# Altium PCB ESP32_USBC_V1_I1.PcbDoc (part 2 of 3)
Units mil, origin at the board's own origin, x right, y up, seen from the top; angles counter-clockwise.
Board outline 2700 x 1000 mil, 4 copper layers (L1, L2, L3, L4), stack 61.583 mil thick; 64 components, 73 nets, 299 pads, 161 vias.
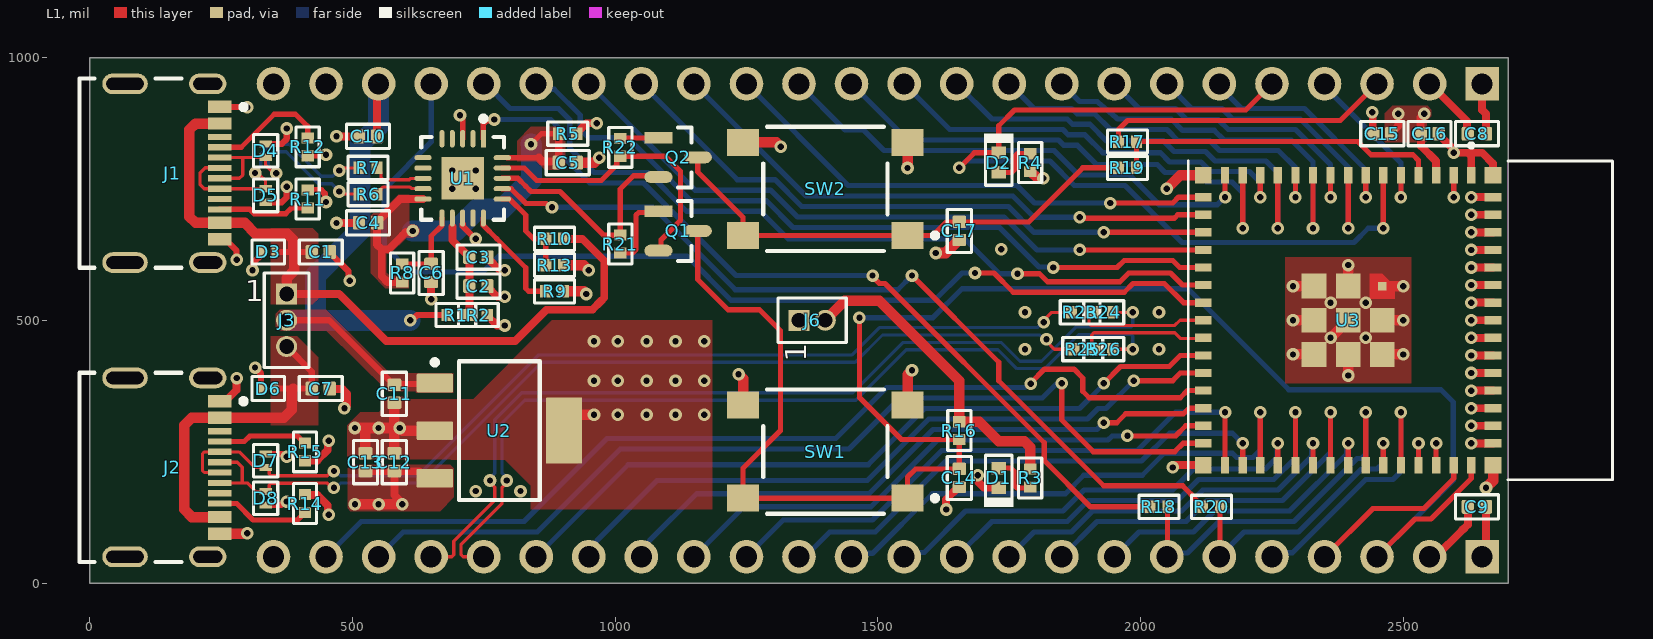
[diagram p0: L1 view]

## Part data (continued)
R3 R4: library part RC0402FR-071KL, "RES 1K OHM 1% 1/16W 0402", Case Code (Imperial)=0402, Manufacturer="Yageo Group", Max Operating Temperature=155°C, Min Operating Temperature=-55°C, Power Dissipation=62.5mW, Power Rating=63mW, Supplier Part Number=311-1.00KLRCT-ND, Temperature Coefficient=100ppm/°C, Voltage Rating (AC)=50V, Case Code (Metric)=0402, Case/Package=0402, Category="Chip SMD Resistors", China RoHS=Non-Compliant, ComponentLink1Description=https://datasheet.octopart.com:443/RC0402FR-071KL-Yageo-datasheet-175887523.pdf?src-supplier=IHS, ComponentLink1URL=https://datasheet.octopart.com:443/RC0402FR-071KL-Yageo-datasheet-175887523.pdf?src-supplier=IHS, ComponentLink2Description=https://datasheet.octopart.com:443/RC0402FR-071KL-Yageo-datasheet-164759695.pdf?src-supplier=Upverter, ComponentLink2URL=https://datasheet.octopart.com:443/RC0402FR-071KL-Yageo-datasheet-164759695.pdf?src-supplier=Upverter, ComponentLink3Description=https://datasheet.octopart.com:443/RC0402FR-071KL-Yageo-datasheet-103092701.pdf?src-supplier=Upverter, ComponentLink3URL=https://datasheet.octopart.com:443/RC0402FR-071KL-Yageo-datasheet-103092701.pdf?src-supplier=Upverter, ComponentLink4Description=https://sigma.octopart.com:443/138820526/technical_drawing/Yageo-RC0402FR-071KL.pdf?src-supplier=Upverter, ComponentLink4URL=https://sigma.octopart.com:443/138820526/technical_drawing/Yageo-RC0402FR-071KL.pdf?src-supplier=Upverter, ComponentLink5Description=https://datasheet.octopart.com:443/RC0402FR-071KL-Yageo-datasheet-98239111.pdf?src-supplier=Upverter, ComponentLink5URL=https://datasheet.octopart.com:443/RC0402FR-071KL-Yageo-datasheet-98239111.pdf?src-supplier=Upverter, ComponentLink6Description=https://datasheet.octopart.com:443/RC0402FR-071KL-Yageo-datasheet-10408619.pdf?src-supplier=Newark, ComponentLink6URL=https://datasheet.octopart.com:443/RC0402FR-071KL-Yageo-datasheet-10408619.pdf?src-supplier=Newark, ComponentLink7Description=https://datasheet.octopart.com:443/RC0402FR-071KL-Yageo-datasheet-8324527.pdf?src-supplier=Newark, ComponentLink7URL=https://datasheet.octopart.com:443/RC0402FR-071KL-Yageo-datasheet-8324527.pdf?src-supplier=Newark, ComponentLink8Description=https://datasheet.octopart.com:443/RC0402FR-071KL-Yageo-datasheet-62067350.pdf?src-supplier=Farnell, ComponentLink8URL=https://datasheet.octopart.com:443/RC0402FR-071KL-Yageo-datasheet-62067350.pdf?src-supplier=Farnell, ComponentLink9Description=https://datasheet.octopart.com:443/RC0402FR-071KL-Yageo-datasheet-12531192.pdf?src-supplier=Future+Electronics, ComponentLink9URL=https://datasheet.octopart.com:443/RC0402FR-071KL-Yageo-datasheet-12531192.pdf?src-supplier=Future+Electronics, ComponentLink10Description=https://datasheet.octopart.com:443/RC0402FR-071KL-Yageo-datasheet-137700087.pdf?src-supplier=Future+Electronics, ComponentLink10URL=https://datasheet.octopart.com:443/RC0402FR-071KL-Yageo-datasheet-137700087.pdf?src-supplier=Future+Electronics, ComponentLink11Description=https://datasheet.octopart.com:443/RC0402FR-071KL-Yageo-datasheet-8324255.pdf?src-supplier=Future+Electronics, ComponentLink11URL=https://datasheet.octopart.com:443/RC0402FR-071KL-Yageo-datasheet-8324255.pdf?src-supplier=Future+Electronics, ComponentLink12Description=https://datasheet.octopart.com:443/RC0402FR-071KL-Yageo-datasheet-8329306.pdf?src-supplier=element14, ComponentLink12URL=https://datasheet.octopart.com:443/RC0402FR-071KL-Yageo-datasheet-8329306.pdf?src-supplier=element14, ComponentLink13Description=https://datasheet.octopart.com:443/RC0402FR-071KL-Yageo-datasheet-505231.pdf?src-supplier=element14, ComponentLink13URL=https://datasheet.octopart.com:443/RC0402FR-071KL-Yageo-datasheet-505231.pdf?src-supplier=element14, ComponentLink14Description=https://datasheet.octopart.com:443/RC0402FR-071KL-Yageo-datasheet-175423674.pdf?src-supplier=SOS+electronic, ComponentLink14URL=https://datasheet.octopart.com:443/RC0402FR-071KL-Yageo-datasheet-175423674.pdf?src-supplier=SOS+electronic, ComponentLink15Description=https://datasheet.octopart.com:443/RC0402FR-071KL-Yageo-datasheet-148775077.pdf?src-supplier=TME, ComponentLink15URL=https://datasheet.octopart.com:443/RC0402FR-071KL-Yageo-datasheet-148775077.pdf?src-supplier=TME, ComponentLink16Description=https://datasheet.octopart.com:443/RC0402FR-071KL-Yageo-datasheet-79472498.pdf?src-supplier=Megastar, ComponentLink16URL=https://datasheet.octopart.com:443/RC0402FR-071KL-Yageo-datasheet-79472498.pdf?src-supplier=Megastar, ComponentLink17Description=https://datasheet.octopart.com/RC0402FR-071KL-Yageo-datasheet-73766026.pdf, ComponentLink17URL=https://datasheet.octopart.com/RC0402FR-071KL-Yageo-datasheet-73766026.pdf, ComponentLink18Description=http://sigma.octopart.com:80/conflict_mineral_statement/Yageo-company-3.pdf?src-supplier=Compliance+Statements, ComponentLink18URL=http://sigma.octopart.com:80/conflict_mineral_statement/Yageo-company-3.pdf?src-supplier=Compliance+Statements, ComponentLink19Description=http://sigma.octopart.com:80/rohs_statement/Yageo-company-2.pdf?src-supplier=Compliance+Statements, ComponentLink19URL=http://sigma.octopart.com:80/rohs_statement/Yageo-company-2.pdf?src-supplier=Compliance+Statements, Composition="Thick Film", Depth=500µm, GRAMS Lib Spec=2.7, Height=350µm, Lead Free="Lead Free", Length=1mm, Lifecycle Status=Production, Manufacturer Part Number=RC0402FR-071KL, Military Standard=Not, Mounting Technology="Surface Mount", Number of Terminals=2, Packaging="Tape & Reel", Parameter 1=C106235, Pins=2, Pricing="1=0.1, 10=0.007, 25=0.0068, 50=0.0062, 100=0.0056, 250=0.00308 (USD)", REACH SVHC=Yes, RoHS=Compliant, Schedule B="8533210045, 8533210045|8533210045|8533210045|8533210045|8533210045|8533210045|8533210045|8533210045|8533210045|8533210045|8533210045|8533210045|8533210045|8533210045|8533210045|8533210045|8533210045|8533210045|8533210045|8533210045|8533210045|8533210045|8533210045|85", Stock=1163425, Supplier=DigiKey, Termination=SMD/SMT, Voltage Rating (DC)=50V, Width=500µm, Working Voltage=50V
R6 R7 R17 R19: library part RC0402FR-0727RL, "RES 27 OHM 1% 1/16W 0402", Case Code (Imperial)=0402, Case Code (Metric)=1005, LCSC Part Number=C138021, Manufacturer="Yageo Group", Max Operating Temperature=155°C, Max Power Dissipation=63mW, Min Operating Temperature=-55°C, Power Dissipation=62.5mW, Supplier Part Number=YAG3086CT-ND, Temperature Coefficient=100ppm/°C, Voltage Rating (AC)=50V, Case/Package=0402, Category="Chip SMD Resistors", China RoHS=Non-Compliant, ComponentLink1Description=https://datasheet.octopart.com:443/RC0402FR-0727RL-Yageo-datasheet-175887523.pdf?src-supplier=Newark, ComponentLink1URL=https://datasheet.octopart.com:443/RC0402FR-0727RL-Yageo-datasheet-175887523.pdf?src-supplier=Newark, ComponentLink2Description=https://datasheet.octopart.com:443/RC0402FR-0727RL-Yageo-datasheet-8324527.pdf?src-supplier=Newark, ComponentLink2URL=https://datasheet.octopart.com:443/RC0402FR-0727RL-Yageo-datasheet-8324527.pdf?src-supplier=Newark, ComponentLink3Description=https://datasheet.octopart.com:443/RC0402FR-0727RL-Yageo-datasheet-103092701.pdf?src-supplier=Upverter, ComponentLink3URL=https://datasheet.octopart.com:443/RC0402FR-0727RL-Yageo-datasheet-103092701.pdf?src-supplier=Upverter, ComponentLink4Description=https://datasheet.octopart.com:443/RC0402FR-0727RL-Yageo-datasheet-10408619.pdf?src-supplier=element14+APAC, ComponentLink4URL=https://datasheet.octopart.com:443/RC0402FR-0727RL-Yageo-datasheet-10408619.pdf?src-supplier=element14+APAC, ComponentLink5Description=https://datasheet.octopart.com:443/RC0402FR-0727RL-Yageo-datasheet-62067350.pdf?src-supplier=element14+APAC, ComponentLink5URL=https://datasheet.octopart.com:443/RC0402FR-0727RL-Yageo-datasheet-62067350.pdf?src-supplier=element14+APAC, ComponentLink6Description=https://datasheet.octopart.com:443/RC0402FR-0727RL-Yageo-datasheet-175423674.pdf?src-supplier=SOS+electronic, ComponentLink6URL=https://datasheet.octopart.com:443/RC0402FR-0727RL-Yageo-datasheet-175423674.pdf?src-supplier=SOS+electronic, ComponentLink7Description=https://datasheet.octopart.com:443/RC0402FR-0727RL-Yageo-datasheet-8329306.pdf?src-supplier=SOS+electronic, ComponentLink7URL=https://datasheet.octopart.com:443/RC0402FR-0727RL-Yageo-datasheet-8329306.pdf?src-supplier=SOS+electronic, ComponentLink8Description=https://datasheet.octopart.com:443/RC0402FR-0727RL-Yageo-datasheet-164759695.pdf?src-supplier=Future+Electronics, ComponentLink8URL=https://datasheet.octopart.com:443/RC0402FR-0727RL-Yageo-datasheet-164759695.pdf?src-supplier=Future+Electronics, ComponentLink9Description=https://datasheet.octopart.com:443/RC0402FR-0727RL-Yageo-datasheet-137700087.pdf?src-supplier=Future+Electronics, ComponentLink9URL=https://datasheet.octopart.com:443/RC0402FR-0727RL-Yageo-datasheet-137700087.pdf?src-supplier=Future+Electronics, ComponentLink10Description=https://datasheet.octopart.com:443/RC0402FR-0727RL-Yageo-datasheet-12531192.pdf?src-supplier=Future+Electronics, ComponentLink10URL=https://datasheet.octopart.com:443/RC0402FR-0727RL-Yageo-datasheet-12531192.pdf?src-supplier=Future+Electronics, ComponentLink11Description=https://datasheet.octopart.com:443/RC0402FR-0727RL-Yageo-datasheet-148775077.pdf?src-supplier=TME, ComponentLink11URL=https://datasheet.octopart.com:443/RC0402FR-0727RL-Yageo-datasheet-148775077.pdf?src-supplier=TME, ComponentLink12Description=https://datasheet.octopart.com/RC0402FR-0727RL-Yageo-datasheet-73766026.pdf, ComponentLink12URL=https://datasheet.octopart.com/RC0402FR-0727RL-Yageo-datasheet-73766026.pdf, ComponentLink13Description=http://sigma.octopart.com:80/conflict_mineral_statement/Yageo-company-3.pdf?src-supplier=Compliance+Statements, ComponentLink13URL=http://sigma.octopart.com:80/conflict_mineral_statement/Yageo-company-3.pdf?src-supplier=Compliance+Statements, ComponentLink14Description=http://sigma.octopart.com:80/rohs_statement/Yageo-company-2.pdf?src-supplier=Compliance+Statements, ComponentLink14URL=http://sigma.octopart.com:80/rohs_statement/Yageo-company-2.pdf?src-supplier=Compliance+Statements, Composition="Thick Film", Depth=500µm, Features="Moisture Resistant", GRAMS Lib Spec=2.7, Height=350µm, Lead Free="Lead Free", Length=1mm, Lifecycle Status=Production, Manufacturer Part Number=RC0402FR-0727RL, Military Standard=Not, Mounting Technology="Surface Mount", Number of Terminals=2, Number of Terminations=2, Pins=2, Power Rating=63mW, Pricing="1=0.1, 10=0.007, 25=0.0068, 50=0.0062, 100=0.0051, 250=0.00308 (USD)", REACH SVHC=Yes, RoHS=Compliant, Schedule B="8533210045, 8533210045|8533210045, 8533210045|8533210045|8533210045, 8533210045|8533210045|8533210045|8533210045", Stock=387948, Supplier=DigiKey, Termination=SMD/SMT, Voltage Rating (DC)=50V, Weight=652.039032µg, Width=500µm, Working Voltage=50V
R9 R13 R16 R21 R22: library part AC0402FR-0710KL, "RES SMD 10K OHM 1% 1/16W 0402", Case Code (Imperial)=0402, Case Code (Metric)=1005, LCSC Part Number=C144807, Manufacturer="Yageo Group", Max Operating Temperature=155°C, Max Power Dissipation=63mW, Min Operating Temperature=-55°C, Power Dissipation=62.5mW, Supplier Part Number=YAG3436CT-ND, Temperature Coefficient=100ppm/°C, Working Voltage=50V, Case/Package=0402, Category="Chip SMD Resistors", China RoHS=Non-Compliant, ComponentLink1Description=https://datasheet.octopart.com:443/AC0402FR-0710KL-Yageo-datasheet-182189377.pdf?src-supplier=IHS, ComponentLink1URL=https://datasheet.octopart.com:443/AC0402FR-0710KL-Yageo-datasheet-182189377.pdf?src-supplier=IHS, ComponentLink2Description=https://datasheet.octopart.com:443/AC0402FR-0710KL-Yageo-datasheet-83209224.pdf?src-supplier=Upverter, ComponentLink2URL=https://datasheet.octopart.com:443/AC0402FR-0710KL-Yageo-datasheet-83209224.pdf?src-supplier=Upverter, ComponentLink3Description=https://datasheet.octopart.com:443/AC0402FR-0710KL-Yageo-datasheet-178509465.pdf?src-supplier=Newark, ComponentLink3URL=https://datasheet.octopart.com:443/AC0402FR-0710KL-Yageo-datasheet-178509465.pdf?src-supplier=Newark, ComponentLink4Description=https://datasheet.octopart.com:443/AC0402FR-0710KL-Yageo-datasheet-166720450.pdf?src-supplier=JRH+Electronics, ComponentLink4URL=https://datasheet.octopart.com:443/AC0402FR-0710KL-Yageo-datasheet-166720450.pdf?src-supplier=JRH+Electronics, ComponentLink5Description=https://datasheet.octopart.com:443/AC0402FR-0710KL-Yageo-datasheet-151884373.pdf?src-supplier=Future+Electronics, ComponentLink5URL=https://datasheet.octopart.com:443/AC0402FR-0710KL-Yageo-datasheet-151884373.pdf?src-supplier=Future+Electronics, ComponentLink6Description=https://datasheet.octopart.com:443/AC0402FR-0710KL-Yageo-datasheet-137699919.pdf?src-supplier=Future+Electronics, ComponentLink6URL=https://datasheet.octopart.com:443/AC0402FR-0710KL-Yageo-datasheet-137699919.pdf?src-supplier=Future+Electronics, ComponentLink7Description=https://datasheet.octopart.com:443/AC0402FR-0710KL-Yageo-datasheet-24580492.pdf?src-supplier=Future+Electronics, ComponentLink7URL=https://datasheet.octopart.com:443/AC0402FR-0710KL-Yageo-datasheet-24580492.pdf?src-supplier=Future+Electronics, ComponentLink8Description=https://datasheet.octopart.com:443/AC0402FR-0710KL-Yageo-datasheet-13029202.pdf?src-supplier=Future+Electronics, ComponentLink8URL=https://datasheet.octopart.com:443/AC0402FR-0710KL-Yageo-datasheet-13029202.pdf?src-supplier=Future+Electronics, ComponentLink9Description=https://datasheet.octopart.com/AC0402FR-0710KL-Yageo-datasheet-12512238.pdf, ComponentLink9URL=https://datasheet.octopart.com/AC0402FR-0710KL-Yageo-datasheet-12512238.pdf, ComponentLink10Description=https://datasheet.octopart.com:443/AC0402FR-0710KL-Yageo-Group-datasheet-164768995.pdf?src-supplier=ODG+(Origin+Data+Global), ComponentLink10URL=https://datasheet.octopart.com:443/AC0402FR-0710KL-Yageo-Group-datasheet-164768995.pdf?src-supplier=ODG+(Origin+Data+Global), ComponentLink11Description=https://datasheet.octopart.com:443/AC0402FR-0710KL-Yageo-datasheet-128677448.pdf?src-supplier=X-ON, ComponentLink11URL=https://datasheet.octopart.com:443/AC0402FR-0710KL-Yageo-datasheet-128677448.pdf?src-supplier=X-ON, ComponentLink12Description=http://sigma.octopart.com:80/conflict_mineral_statement/Yageo-company-3.pdf?src-supplier=Compliance+Statements, ComponentLink12URL=http://sigma.octopart.com:80/conflict_mineral_statement/Yageo-company-3.pdf?src-supplier=Compliance+Statements, ComponentLink13Description=http://sigma.octopart.com:80/rohs_statement/Yageo-company-2.pdf?src-supplier=Compliance+Statements, ComponentLink13URL=http://sigma.octopart.com:80/rohs_statement/Yageo-company-2.pdf?src-supplier=Compliance+Statements, Composition="Thick Film", Depth=500µm, Features="Automotive AEC-Q200, Moisture Resistant", GRAMS Lib Spec=2.7, Height=320µm, Lead Free="Lead Free", Length=990.6µm, Lifecycle Status=Production, Manufacturer Part Number=AC0402FR-0710KL, Military Standard=Not, Mounting Technology="Surface Mount", Number of Terminals=2, Number of Terminations=2, Packaging="Tape & Reel", Power Rating=62.5mW, Pricing="1=0.12, 10=0.009, 25=0.008, 50=0.0072, 100=0.0069, 250=0.00576, 5000=0.00407 (USD)", REACH SVHC=Yes, RoHS=Compliant, Schedule B="8533210045, 8533210045|8533210045|8533210045|8533210045|8533210045|8533210045|8533210045|8533210045|8533210045|8533210045|8533210045|8533210045|8533210045|8533210045|8533210045|8533210045|8533210045|8533210045|8533210045, 8533210045|8533210045|8533210045|8533210045|8533210045|8533210045|8533210045|8533210045|8533210045|8533210045|8533210045|8533210045|8533210045|8533210045|8533210045|8533210045|8533210045|8533210045|8533210045|8533210045|8533210045|8533210045|8533210045|85", Stock=3431105, Supplier=DigiKey, Termination=SMD/SMT, Width=500µm
R10: library part RC0402FR-074K7L, "RES 4.7K OHM 1% 1/16W 0402", Case Code (Imperial)=0402, Case Code (Metric)=1005, LCSC Part Number=C105871, Manufacturer="Yageo Group", Max Operating Temperature=155°C, Min Operating Temperature=-55°C, Power Dissipation=62.5mW, Power Rating=63mW, Supplier Part Number=311-4.7KLRCT-ND, Temperature Coefficient=100ppm/°C, Voltage Rating (AC)=50V, Case/Package=0402, Category="Chip SMD Resistors", China RoHS=Non-Compliant, ComponentLink1Description=https://datasheet.octopart.com:443/RC0402FR-074K7L-Yageo-datasheet-175887523.pdf?src-supplier=IHS, ComponentLink1URL=https://datasheet.octopart.com:443/RC0402FR-074K7L-Yageo-datasheet-175887523.pdf?src-supplier=IHS, ComponentLink2Description=https://datasheet.octopart.com:443/RC0402FR-074K7L-Yageo-datasheet-103092701.pdf?src-supplier=Upverter, ComponentLink2URL=https://datasheet.octopart.com:443/RC0402FR-074K7L-Yageo-datasheet-103092701.pdf?src-supplier=Upverter, ComponentLink3Description=https://datasheet.octopart.com:443/RC0402FR-074K7L-Yageo-datasheet-98239111.pdf?src-supplier=Upverter, ComponentLink3URL=https://datasheet.octopart.com:443/RC0402FR-074K7L-Yageo-datasheet-98239111.pdf?src-supplier=Upverter, ComponentLink4Description=https://datasheet.octopart.com:443/RC0402FR-074K7L-Yageo-Group-datasheet-190051977.pdf?src-supplier=Newark, ComponentLink4URL=https://datasheet.octopart.com:443/RC0402FR-074K7L-Yageo-Group-datasheet-190051977.pdf?src-supplier=Newark, ComponentLink5Description=https://datasheet.octopart.com:443/RC0402FR-074K7L-Yageo-datasheet-12531192.pdf?src-supplier=Newark, ComponentLink5URL=https://datasheet.octopart.com:443/RC0402FR-074K7L-Yageo-datasheet-12531192.pdf?src-supplier=Newark, ComponentLink6Description=https://datasheet.octopart.com:443/RC0402FR-074K7L-Yageo-datasheet-8324527.pdf?src-supplier=Newark, ComponentLink6URL=https://datasheet.octopart.com:443/RC0402FR-074K7L-Yageo-datasheet-8324527.pdf?src-supplier=Newark, ComponentLink7Description=https://datasheet.octopart.com:443/RC0402FR-074K7L-Yageo-datasheet-10408619.pdf?src-supplier=element14+APAC, ComponentLink7URL=https://datasheet.octopart.com:443/RC0402FR-074K7L-Yageo-datasheet-10408619.pdf?src-supplier=element14+APAC, ComponentLink8Description=https://datasheet.octopart.com:443/RC0402FR-074K7L-Yageo-datasheet-13691069.pdf?src-supplier=element14+APAC, ComponentLink8URL=https://datasheet.octopart.com:443/RC0402FR-074K7L-Yageo-datasheet-13691069.pdf?src-supplier=element14+APAC, ComponentLink9Description=https://datasheet.octopart.com:443/RC0402FR-074K7L-Yageo-datasheet-62067350.pdf?src-supplier=Farnell, ComponentLink9URL=https://datasheet.octopart.com:443/RC0402FR-074K7L-Yageo-datasheet-62067350.pdf?src-supplier=Farnell, ComponentLink10Description=https://datasheet.octopart.com:443/RC0402FR-074K7L-Yageo-datasheet-8329306.pdf?src-supplier=element14, ComponentLink10URL=https://datasheet.octopart.com:443/RC0402FR-074K7L-Yageo-datasheet-8329306.pdf?src-supplier=element14, ComponentLink11Description=https://datasheet.octopart.com:443/RC0402FR-074K7L-Yageo-datasheet-175423674.pdf?src-supplier=SOS+electronic, ComponentLink11URL=https://datasheet.octopart.com:443/RC0402FR-074K7L-Yageo-datasheet-175423674.pdf?src-supplier=SOS+electronic, ComponentLink12Description=https://datasheet.octopart.com:443/RC0402FR-074K7L-Yageo-datasheet-164759695.pdf?src-supplier=Future+Electronics, ComponentLink12URL=https://datasheet.octopart.com:443/RC0402FR-074K7L-Yageo-datasheet-164759695.pdf?src-supplier=Future+Electronics, ComponentLink13Description=https://datasheet.octopart.com:443/RC0402FR-074K7L-Yageo-datasheet-137700087.pdf?src-supplier=Future+Electronics, ComponentLink13URL=https://datasheet.octopart.com:443/RC0402FR-074K7L-Yageo-datasheet-137700087.pdf?src-supplier=Future+Electronics, ComponentLink14Description=https://datasheet.octopart.com:443/RC0402FR-074K7L-Yageo-datasheet-79472498.pdf?src-supplier=Megastar, ComponentLink14URL=https://datasheet.octopart.com:443/RC0402FR-074K7L-Yageo-datasheet-79472498.pdf?src-supplier=Megastar, ComponentLink15Description=https://datasheet.octopart.com/RC0402FR-074K7L-Yageo-datasheet-73766026.pdf, ComponentLink15URL=https://datasheet.octopart.com/RC0402FR-074K7L-Yageo-datasheet-73766026.pdf, ComponentLink16Description=http://sigma.octopart.com:80/conflict_mineral_statement/Yageo-company-3.pdf?src-supplier=Compliance+Statements, ComponentLink16URL=http://sigma.octopart.com:80/conflict_mineral_statement/Yageo-company-3.pdf?src-supplier=Compliance+Statements, ComponentLink17Description=http://sigma.octopart.com:80/rohs_statement/Yageo-company-2.pdf?src-supplier=Compliance+Statements, ComponentLink17URL=http://sigma.octopart.com:80/rohs_statement/Yageo-company-2.pdf?src-supplier=Compliance+Statements, Composition="Thick Film", Depth=500µm, GRAMS Lib Spec=2.7, Height=350µm, Lead Free="Lead Free", Length=1mm, Lifecycle Status=Production, Manufacturer Part Number=RC0402FR-074K7L, Military Standard=Not, Mounting Technology="Surface Mount", Number of Terminals=2, Packaging="Tape & Reel", Pins=2, Pricing="1=0.1, 10=0.010, 25=0.008, 50=0.0062, 100=0.0056, 250=0.00472, 500=0.00328 (USD)", REACH SVHC=Yes, RoHS=Compliant, Schedule B="8533210045, 8533210045|8533210045, 8533210045|8533210045|8533210045, 8533210045|8533210045|8533210045|8533210045", Stock=5214595, Supplier=DigiKey, Termination=SMD/SMT, Voltage Rating (DC)=50V, Width=500µm, Working Voltage=50V
R11 R12 R14 R15: library part AC0402FR-075K1L, "RES SMD 5.1K OHM 1% 1/16W 0402", Case Code (Imperial)=0402, Case Code (Metric)=1005, LCSC Part Number=C144745, Manufacturer="Yageo Group", Max Operating Temperature=155°C, Max Power Dissipation=63mW, Min Operating Temperature=-55°C, Power Dissipation=62.5mW, Supplier Part Number=YAG3503CT-ND, Temperature Coefficient=100ppm/°C, Working Voltage=50V, Case/Package=0402, Category="Chip SMD Resistors", China RoHS=Non-Compliant, ComponentLink1Description=https://datasheet.octopart.com:443/AC0402FR-075K1L-Yageo-datasheet-182189377.pdf?src-supplier=IHS, ComponentLink1URL=https://datasheet.octopart.com:443/AC0402FR-075K1L-Yageo-datasheet-182189377.pdf?src-supplier=IHS, ComponentLink2Description=https://datasheet.octopart.com:443/AC0402FR-075K1L-Yageo-datasheet-83209224.pdf?src-supplier=Upverter, ComponentLink2URL=https://datasheet.octopart.com:443/AC0402FR-075K1L-Yageo-datasheet-83209224.pdf?src-supplier=Upverter, ComponentLink3Description=https://datasheet.octopart.com:443/AC0402FR-075K1L-Yageo-datasheet-178509465.pdf?src-supplier=Newark, ComponentLink3URL=https://datasheet.octopart.com:443/AC0402FR-075K1L-Yageo-datasheet-178509465.pdf?src-supplier=Newark, ComponentLink4Description=https://datasheet.octopart.com/AC0402FR-075K1L-Yageo-datasheet-12512238.pdf, ComponentLink4URL=https://datasheet.octopart.com/AC0402FR-075K1L-Yageo-datasheet-12512238.pdf, ComponentLink5Description=https://datasheet.octopart.com:443/AC0402FR-075K1L-Yageo-datasheet-166720450.pdf?src-supplier=Future+Electronics, ComponentLink5URL=https://datasheet.octopart.com:443/AC0402FR-075K1L-Yageo-datasheet-166720450.pdf?src-supplier=Future+Electronics, ComponentLink6Description=https://datasheet.octopart.com:443/AC0402FR-075K1L-Yageo-datasheet-151884373.pdf?src-supplier=Future+Electronics, ComponentLink6URL=https://datasheet.octopart.com:443/AC0402FR-075K1L-Yageo-datasheet-151884373.pdf?src-supplier=Future+Electronics, ComponentLink7Description=https://datasheet.octopart.com:443/AC0402FR-075K1L-Yageo-datasheet-137699919.pdf?src-supplier=Future+Electronics, ComponentLink7URL=https://datasheet.octopart.com:443/AC0402FR-075K1L-Yageo-datasheet-137699919.pdf?src-supplier=Future+Electronics, ComponentLink8Description=https://datasheet.octopart.com:443/AC0402FR-075K1L-Yageo-datasheet-24580492.pdf?src-supplier=Future+Electronics, ComponentLink8URL=https://datasheet.octopart.com:443/AC0402FR-075K1L-Yageo-datasheet-24580492.pdf?src-supplier=Future+Electronics, ComponentLink9Description=https://datasheet.octopart.com:443/AC0402FR-075K1L-Yageo-datasheet-13029202.pdf?src-supplier=Future+Electronics, ComponentLink9URL=https://datasheet.octopart.com:443/AC0402FR-075K1L-Yageo-datasheet-13029202.pdf?src-supplier=Future+Electronics, ComponentLink10Description=https://datasheet.octopart.com:443/AC0402FR-075K1L-Yageo-Group-datasheet-164768995.pdf?src-supplier=ODG+(Origin+Data+Global), ComponentLink10URL=https://datasheet.octopart.com:443/AC0402FR-075K1L-Yageo-Group-datasheet-164768995.pdf?src-supplier=ODG+(Origin+Data+Global), ComponentLink11Description=http://sigma.octopart.com:80/conflict_mineral_statement/Yageo-company-3.pdf?src-supplier=Compliance+Statements, ComponentLink11URL=http://sigma.octopart.com:80/conflict_mineral_statement/Yageo-company-3.pdf?src-supplier=Compliance+Statements, ComponentLink12Description=http://sigma.octopart.com:80/rohs_statement/Yageo-company-2.pdf?src-supplier=Compliance+Statements, ComponentLink12URL=http://sigma.octopart.com:80/rohs_statement/Yageo-company-2.pdf?src-supplier=Compliance+Statements, Composition="Thick Film", Depth=500µm, Features="Automotive AEC-Q200, Moisture Resistant", GRAMS Lib Spec=2.7, Height=320µm, Lead Free="Lead Free", Length=990.6µm, Lifecycle Status=Production, Manufacturer Part Number=AC0402FR-075K1L, Military Standard=Not, Mounting Technology="Surface Mount", Number of Terminals=2, Number of Terminations=2, Power Rating=62.5mW, Pricing="1=0.1, 10=0.009, 25=0.008, 50=0.0072, 100=0.0066, 250=0.00576, 500=0.00406 (USD)", REACH SVHC=Yes, RoHS=Compliant, Schedule B="8533210045, 8533210045|8533210045|8533210045|8533210045|8533210045|8533210045|8533210045|8533210045|8533210045|8533210045|8533210045|8533210045|8533210045|8533210045|8533210045|8533210045|8533210045|8533210045|8533210045|8533210045|8533210045|8533210045|8533210045|85", Stock=865, Supplier=DigiKey, Width=500µm
SW1 SW2: "SWITCH TACTILE SPST-NO 0.05A 12V", Case/Package=SMD/SMT, Color=Black, Contact Current Rating=50mA, Contact Resistance=100mΩ, Insulation Resistance=100GΩ, LCSC Part Number=C144807, Manufacturer="C&K Components", Max Operating Temperature=60°C, Max Voltage Rating (DC)=12V, Min Operating Temperature=-20°C, Operating Force=1.96N, Supplier Part Number=611-PTS645SH50SMTR92, Actuator Material="Nylon, Polyamide", Category="Tactile Switches", ComponentLink1Description=https://datasheet.octopart.com:443/PTS645SH50SMTR92LFS-C%26K-Components-datasheet-169841344.pdf?src-supplier=Farnell, ComponentLink1URL=https://datasheet.octopart.com:443/PTS645SH50SMTR92LFS-C%26K-Components-datasheet-169841344.pdf?src-supplier=Farnell, ComponentLink2Description=https://datasheet.octopart.com:443/PTS645SH50SMTR92LFS-C%26K-Components-datasheet-165782998.pdf?src-supplier=Farnell, ComponentLink2URL=https://datasheet.octopart.com:443/PTS645SH50SMTR92LFS-C%26K-Components-datasheet-165782998.pdf?src-supplier=Farnell, ComponentLink3Description=https://datasheet.octopart.com:443/PTS645SH50SMTR92LFS-C%26K-Components-datasheet-67873720.pdf?src-supplier=Upverter, ComponentLink3URL=https://datasheet.octopart.com:443/PTS645SH50SMTR92LFS-C%26K-Components-datasheet-67873720.pdf?src-supplier=Upverter, ComponentLink4Description=https://datasheet.octopart.com:443/PTS645SH50SMTR92-LFS-C%26K-Components-datasheet-141421486.pdf?src-supplier=Upverter, ComponentLink4URL=https://datasheet.octopart.com:443/PTS645SH50SMTR92-LFS-C%26K-Components-datasheet-141421486.pdf?src-supplier=Upverter, ComponentLink5Description=https://datasheet.octopart.com:443/PTS645SH50SMTR92-LFS-C%26K-Components-datasheet-110647872.pdf?src-supplier=TME, ComponentLink5URL=https://datasheet.octopart.com:443/PTS645SH50SMTR92-LFS-C%26K-Components-datasheet-110647872.pdf?src-supplier=TME, ComponentLink6Description=https://datasheet.octopart.com:443/PTS645SH50SMTR-92-LFS-C%26K-Components-datasheet-150821959.pdf?src-supplier=TME, ComponentLink6URL=https://datasheet.octopart.com:443/PTS645SH50SMTR-92-LFS-C%26K-Components-datasheet-150821959.pdf?src-supplier=TME, ComponentLink7Description=https://datasheet.octopart.com:443/PTS645SH50SMTR92LFS-C%26K-Components-datasheet-138128951.pdf?src-supplier=Future+Electronics, ComponentLink7URL=https://datasheet.octopart.com:443/PTS645SH50SMTR92LFS-C%26K-Components-datasheet-138128951.pdf?src-supplier=Future+Electronics, ComponentLink8Description=https://datasheet.octopart.com:443/PTS645SH50SMTR92LFS-C%26K-Components-datasheet-62111174.pdf?src-supplier=Future+Electronics, ComponentLink8URL=https://datasheet.octopart.com:443/PTS645SH50SMTR92LFS-C%26K-Components-datasheet-62111174.pdf?src-supplier=Future+Electronics, ComponentLink9Description=https://datasheet.octopart.com:443/PTS645SH50SMTR92LFS-C%26K-Components-datasheet-24578962.pdf?src-supplier=Future+Electronics, ComponentLink9URL=https://datasheet.octopart.com:443/PTS645SH50SMTR92LFS-C%26K-Components-datasheet-24578962.pdf?src-supplier=Future+Electronics, ComponentLink10Description=https://datasheet.octopart.com:443/PTS645SH50SMTR92-LFS-C%26K-Components-datasheet-12590747.pdf?src-supplier=Future+Electronics, ComponentLink10URL=https://datasheet.octopart.com:443/PTS645SH50SMTR92-LFS-C%26K-Components-datasheet-12590747.pdf?src-supplier=Future+Electronics, Contact Material=Bronze, Contact Plating=Silver, Depth=9mm, Electrical Life=100kcycles, GRAMS Lib Spec=2.7, Height=3.4544mm, Illumination Type="Illuminated, Non-Illuminated", Lead Free="Lead Free", Length=6mm, Life (Cycles)=100kcycles, Lifecycle Status=Production, Manufacturer Part Number=PTS645SH50SMTR92LFS, Max Current Rating=50mA, Mechanical Life=100kcycles, Mounting Technology="Surface Mount", Number of Positions=1, Orientation=Straight, Packaging="Tape & Reel (TR)", Pricing="1=0.35, 10=0.3, 50=0.281, 100=0.251, 1000=0.17, 10000=0.165 (USD)", REACH SVHC=Yes, RoHS=Compliant, Stock=10114, Supplier=Mouser, Switch Function=Off-Mom, Termination="Gull Wing", Throw Configuration=SPST, Voltage Rating (DC)=12V
U1: "IC USB SERIAL FULL UART 20QFN", Ambient Temperature Range High=85°C, Case/Package=QFN, Clock Frequency=12.02MHz, LCSC Part Number=C132159, Manufacturer=FTDI, Max Supply Current=8.4mA, Max Supply Voltage=5.5V, Min Operating Temperature=-40°C, Min Supply Voltage=2.97V, Operating Supply Current=8mA, Operating Supply Voltage=5V, Supplier Part Number=768-1128-6-ND, Category="Interface ICs", ComponentLink1Description=https://datasheet.octopart.com:443/FT231XQ-R-FTDI-datasheet-182343132.pdf?src-supplier=IHS, ComponentLink1URL=https://datasheet.octopart.com:443/FT231XQ-R-FTDI-datasheet-182343132.pdf?src-supplier=IHS, ComponentLink2Description=https://datasheet.octopart.com:443/FT231XQ-R-FTDI-datasheet-11021087.pdf?src-supplier=ODG+(Origin+Data+Global), ComponentLink2URL=https://datasheet.octopart.com:443/FT231XQ-R-FTDI-datasheet-11021087.pdf?src-supplier=ODG+(Origin+Data+Global), ComponentLink3Description=https://datasheet.octopart.com:443/FT231XQ-R-FTDI-datasheet-28834672.pdf?src-supplier=SOS+electronic, ComponentLink3URL=https://datasheet.octopart.com:443/FT231XQ-R-FTDI-datasheet-28834672.pdf?src-supplier=SOS+electronic, ComponentLink4Description=https://datasheet.octopart.com:443/FT231XQ-R-FTDI-datasheet-68321328.pdf?src-supplier=TME, ComponentLink4URL=https://datasheet.octopart.com:443/FT231XQ-R-FTDI-datasheet-68321328.pdf?src-supplier=TME, ComponentLink5Description=https://datasheet.octopart.com:443/FT231XQ-R-FTDI-datasheet-134530624.pdf?src-supplier=SHENGYU+ELECTRONICS, ComponentLink5URL=https://datasheet.octopart.com:443/FT231XQ-R-FTDI-datasheet-134530624.pdf?src-supplier=SHENGYU+ELECTRONICS, Data Rate=12Mbps, GRAMS Lib Spec=2.7, Height=800µm, Height - Seated (Max)=800µm, Interface="UART, USB", Lead Free="Lead Free", Length=4mm, Lifecycle Status=Production, Manufacturer Part Number=FT231XQ-R, Max Operating Temperature=85°C, Mounting Technology="Surface Mount", Number of Channels=1, Number of Terminals=20, Pins=20, Pricing="1=2.34, 25=2.27, 100=2.2, 250=2, 500=1.82002, 1000=1.7625 (USD)", REACH SVHC=Yes, RoHS=Compliant, Supplier=DigiKey, Terminal Pitch=500µm, Weight=123.008581mg, Width=4mm
U2: "IC REG LIN 3.3V 1.5A SOT-223-4", Case/Package=SOT-223, Dropout Voltage=340mV, Input Bias Current=1mA, LCSC Part Number=C181262, Manufacturer="Texas Instruments", Manufacturer Lifecycle Status=ACTIVE, Max Operating Temperature=125°C, Max Output current=1.5A, Max Output Voltage=3.3V, Max Supply Voltage=20V, Min Current Limit=1.6A, Min Input Voltage=2.1V, Min Operating Temperature=-40°C, Supplier Part Number=296-24897-1-ND, Accuracy=3%, Category="LDO Voltage Regulators", ComponentLink1Description=https://datasheet.octopart.com:443/TL1963A-33DCYR-Texas-Instruments-datasheet-36835243.pdf?src-supplier=Texas+Instruments, ComponentLink1URL=https://datasheet.octopart.com:443/TL1963A-33DCYR-Texas-Instruments-datasheet-36835243.pdf?src-supplier=Texas+Instruments, ComponentLink2Description=https://octopart.com:443/opatz8j6/c1?t=jcaREgKzx9pWjY4dF3QUf4qBw0cQ3-uHVs8UZSr6o9B3A-jkkRXpi1vY_AkybqawkMvtvnQL3aVmXRGu9IYjInupH5_Q1Gsn9a54_TRHO47sxqawd2MPLwfzQ5z90ozh9GhIZJxFrBqnpY7rJmr0vnj3xM9_sC8O7yxN-Pkt-pJA4FHP-HpZJkIE-0AwL7jtfH36M3lt_-YiG6EhWDEbvLkT8IDmgmuvjY0v_Ckb-YL77MI2fpKcyxjxA_UYyDj8F2I8bA9pQJWES1WwwvD-Y6bF82dz4rWlvE4KuTIdT8f61SL68G4s9rmQ-jDZzwJ2cTtcZ04rGTqhudvLcjvbPVMxIMPXAf0KiPTpGOkFgs3QjCJavo91QkizFZdvMKuWLarFPMc&src-supplier=Texas+Instruments, ComponentLink2URL=https://octopart.com:443/opatz8j6/c1?t=jcaREgKzx9pWjY4dF3QUf4qBw0cQ3-uHVs8UZSr6o9B3A-jkkRXpi1vY_AkybqawkMvtvnQL3aVmXRGu9IYjInupH5_Q1Gsn9a54_TRHO47sxqawd2MPLwfzQ5z90ozh9GhIZJxFrBqnpY7rJmr0vnj3xM9_sC8O7yxN-Pkt-pJA4FHP-HpZJkIE-0AwL7jtfH36M3lt_-YiG6EhWDEbvLkT8IDmgmuvjY0v_Ckb-YL77MI2fpKcyxjxA_UYyDj8F2I8bA9pQJWES1WwwvD-Y6bF82dz4rWlvE4KuTIdT8f61SL68G4s9rmQ-jDZzwJ2cTtcZ04rGTqhudvLcjvbPVMxIMPXAf0KiPTpGOkFgs3QjCJavo91QkizFZdvMKuWLarFPMc&src-supplier=Texas+Instruments, ComponentLink3Description=https://datasheet.octopart.com:443/TL1963A-33DCYR-Texas-Instruments-datasheet-10255270.pdf?src-supplier=Texas+Instruments, ComponentLink3URL=https://datasheet.octopart.com:443/TL1963A-33DCYR-Texas-Instruments-datasheet-10255270.pdf?src-supplier=Texas+Instruments, ComponentLink4Description=https://sigma.octopart.com:443/49253063/technical_drawing/Texas-Instruments-TL1963A-33DCYR.pdf?src-supplier=Texas+Instruments, ComponentLink4URL=https://sigma.octopart.com:443/49253063/technical_drawing/Texas-Instruments-TL1963A-33DCYR.pdf?src-supplier=Texas+Instruments, ComponentLink5Description=https://datasheet.octopart.com:443/TL1963A-33DCYR-Texas-Instruments-datasheet-159117591.pdf?src-supplier=Augswan, ComponentLink5URL=https://datasheet.octopart.com:443/TL1963A-33DCYR-Texas-Instruments-datasheet-159117591.pdf?src-supplier=Augswan, ComponentLink6Description=https://datasheet.octopart.com:443/TL1963A-33DCYR-Texas-Instruments-datasheet-21820479.pdf?src-supplier=Newark, ComponentLink6URL=https://datasheet.octopart.com:443/TL1963A-33DCYR-Texas-Instruments-datasheet-21820479.pdf?src-supplier=Newark, ComponentLink7Description=https://datasheet.octopart.com:443/TL1963A-33DCYR-Texas-Instruments-datasheet-16079880.pdf?src-supplier=Farnell, ComponentLink7URL=https://datasheet.octopart.com:443/TL1963A-33DCYR-Texas-Instruments-datasheet-16079880.pdf?src-supplier=Farnell, ComponentLink8Description=https://datasheet.octopart.com:443/TL1963A-33DCYR-Texas-Instruments-datasheet-14171511.pdf?src-supplier=iiiC, ComponentLink8URL=https://datasheet.octopart.com:443/TL1963A-33DCYR-Texas-Instruments-datasheet-14171511.pdf?src-supplier=iiiC, ComponentLink9Description=http://sigma.octopart.com:80/reach_statement/Texas-Instruments-company-64.pdf?src-supplier=Compliance+Statements, ComponentLink9URL=http://sigma.octopart.com:80/reach_statement/Texas-Instruments-company-64.pdf?src-supplier=Compliance+Statements, ComponentLink10Description=http://sigma.octopart.com:80/conflict_mineral_statement/Texas-Instruments-company-63.pdf?src-supplier=Compliance+Statements, ComponentLink10URL=http://sigma.octopart.com:80/conflict_mineral_statement/Texas-Instruments-company-63.pdf?src-supplier=Compliance+Statements, Contact Plating=Tin, GRAMS Lib Spec=2.7, Height=1.8mm, Lead Free="Lead Free", Length=6.5mm, Lifecycle Status=Production, Manufacturer Part Number=TL1963A-33DCYR, Min Output Voltage=3.3V, Nominal Output Voltage=3.3V, Number Of Outputs=1, Number of Regulators=1, Output Current=1.5A, Output Type=Fixed, Output Voltage=3.3V, Pins=4, Polarity=Positive, Pricing="1=3.13, 10=2.344, 25=2.1476, 100=1.9323, 250=1.82956, 500=1.76766, 1000=1.71669 (USD)", Quiescent Current=1mA, Radiation Hardening=No, REACH SVHC=No, RoHS=Compliant, Schedule B="8542390000, 8542390000|8542390000|8542390000|8542390000|8542390000", Stock=2539, Supplier=DigiKey, Thickness=1.6mm, Width=3.5mm
U3: "20.5dBm ESP32-S3FN8 Chip 2.4GHz SMD WiFi Modules ROHS", LCSC Part Number=C2913206, Manufacturer="Espressif Systems", Supplier Part Number=5407-ESP32-S3-MINI-1-N8CT-ND, Category="RF Transceiver Modules and Modems", ComponentLink1Description=https://datasheet.octopart.com:443/ESP32-S3-MINI-1-N8-Espressif-Systems-datasheet-188867343.pdf?src-supplier=TME, ComponentLink1URL=https://datasheet.octopart.com:443/ESP32-S3-MINI-1-N8-Espressif-Systems-datasheet-188867343.pdf?src-supplier=TME, ComponentLink2Description=https://datasheet.octopart.com:443/ESP32-S3-MINI-1-N8-Espressif-Systems-datasheet-165560562.pdf?src-supplier=TME, ComponentLink2URL=https://datasheet.octopart.com:443/ESP32-S3-MINI-1-N8-Espressif-Systems-datasheet-165560562.pdf?src-supplier=TME, ComponentLink3Description=https://datasheet.octopart.com:443/ESP32-S3-MINI-1-N8-Espressif-Systems-datasheet-165560559.pdf?src-supplier=TME, ComponentLink3URL=https://datasheet.octopart.com:443/ESP32-S3-MINI-1-N8-Espressif-Systems-datasheet-165560559.pdf?src-supplier=TME, GRAMS Lib Spec=2.7, Manufacturer Part Number=ESP32-S3-MINI-1-N8, Pricing="1=5.28, 10=4.566, 25=4.3196, 100=3.9802, 250=3.7768 (USD)", RoHS=Compliant, Stock=8054, Supplier=DigiKey

## Via types
v1: diameter 24, hole 12, L1 to L4, tented both sides, 161 vias

## Nets (pads, with @x,y where several pads share a name; then routed paths per layer and width w, separated by ;. In a path a pad name is that pad's centre, name@x,y a point inside that pad or via, vN(x,y) a via of type N, cw(c..) or ccw(c..) an arc to the next point about the centre after c; other vN are vias at no path point)
+3V3: C8.2 C9.2 C15.2 C16.2 J4.2 J5.1 J6.2 R2.1 R3.2 R4.2 R5.1 R16.2 U3.3 | length 4629.7
  L1 w15: R2.1 756.81,508.82 775.63,490 v1(790,490) ; R5.1 930.14,858.13 930.14,859.31 945.83,875 v1(965,875) ; C15.2 2481.52,859.31 2481.52,860.79 2490.23,869.51 v1(2490.23,892.87) ; v1(2540,892.87) 2532.8,885.66 C16.2 2533.94,853.85 2533.94,831.06 2561.99,803.01 2561.99,775.96 U3.3 ; J4.2 2621.35,878.65 2621.35,856.44 C8.2 ; J5.1 2657.2,57.2 C9.2
  L1 w20: J6.2 1437,537 1503,537 1655,385 R16.2 1692.99,307.01 1730,270 1778.28,270 1790,258.28 R3.2 ; R4.2 1791.18,782.99 1804.17,770 v1(1815,770)
  L2 w15: v1(2490.23,892.87) v1(2540,892.87)
  L2 w20: 2516.57,840 2516.57,838.43 2563.83,791.17 2563.83,452.84 2594.36,422.3 2594.36,198.89 2650,143.25 J5.1
  L2 w40: v1(790,490) 808.57,490 832,513.43 832,653 795,690 795,853.26 826.74,885 955,885 v1(965,875) 1105,875 1255,725 1410,725 ; J6.2 1410,510 1410,725 ; J4.2 2545.41,945.41 2545.41,898.27 v1(2540,892.87) 2540,863.43 2516.57,840 1885,840 v1(1815,770) 1770,725 1410,725
+3V3_FTDI: C4.1 C5.1 R5.2 R8.1 U1.10 U1.20 | length 880.3
  L1 w10: v1(840,835) 860,855 R5.2 R5.2@892.89,854.9 ; C5.1 C5.1@892.89,800.1
  L1 w10.01: U1.20@794.44,809.48 854.94,809.48
  L1 w15: C4.1 547.2,643.92 555.99,635.14 ; C4.1@547.2,686.81 591.02,730.63 U1.10 ; R8.1 567.01,572.99 555.99,584.01 555.99,635.14 ; v1(615,670) 613.28,668.28 602.28,668.28 595,661 569.14,635.14 555.99,635.14 ; 854.94,809.48 862.17,802.25 890.55,802.25 C5.1 ; C5.1@892.89,800.1 R5.2@892.89,854.9
  L4 w40: v1(615,670) 696.26,670 738.26,712 785,712 841,768 841,834 v1(840,835)
+3V3_REG: C12.2 C13.2 J6.1 U2.3 | length 1332.4
  L1 w15: C13.2 C12.2 ; v1(595,150) 595,152.44 580,167.44 C12.2 ; U2.3 640.24,199.45 626.97,212.72 C12.2
  L1 w20: v1(505,150) v1(550,150) v1(595,150)
  L2 w40: v1(505,150) v1(550,150) v1(595,150) 665,220 665,225 ; 1315,465 J6.1
  L2 w60: 665,225 708,268 1191.54,268 1287,363.46 1287,437 1315,465
+5V: C10.2 C11.2 J3.2 J4.22 R1.1 U2.1 | length 1244.2
  L1 w12: J3.2 455.83,500 578.62,377.2 C11.2 581.67,378.88 655.3,378.88 U2.1 ; v1(610,500) 613.25,500 623.25,510 R1.1
  L1 w15: C10.2 547.2,947.2 J4.22
  L4 w40: J3.2 430,500 ; J4.22 550,870 515,835 515,670.6 487.4,643 430,585.6 430,500 ; v1(610,500) 430,500
+5V_VBUS1: C1.2 D3.2 J1.A4B9 J1.B4A9 J3.1 R10.2 | length 1465.2
  L1 w12: D3.2 387.8,630 C1.2
  L1 w15: J3.1 475,550 564.5,460.5 810,460.5 869.5,520 956.72,520 973.36,536.64 979.5,542.78 979.5,613.06 937.56,655 R10.2
  L1 w20: J1.A4B9 201.72,874.41 190,862.69 190,697.15 201.72,685.43 J1.B4A9 295.29,685.43 315.72,665 376.08,665 387.8,653.28 387.8,630 390,627.8 390,595 375,580 J3.1
+5V_VBUS2: C7.2 D6.2 J2.A4B9 J2.B4A9 J3.3 | length 662
  L1 w12: D6.2 387.8,370 C7.2 422.8,402.2 J3.3
  L1 w20: J2.B4A9 194.41,125.59 180,140 180,300 194.57,314.57 J2.A4B9 369.57,314.57 385,330 385,367.2 387.8,370
+VCC_FTDI: C2.2 C3.1 R1.2 R2.2 U1.12 | length 186
  L1 w15: 690.5,678 690.31,677.81 690.31,652.48 717.11,625.69 718.48,625.69 722.8,621.38 C2.2 722.8,519.96 714.02,511.18 R1.2
BTN_GPIO0: C17.2 Q2.3 R19.2 SW2.1 SW2.2 | length 952
  L1 w10: Q2.3 1157.42,782.08 1243.35,696.15 1243.35,661.57 SW2.2 SW2.1 1604.92,661.42 1630.71,687.2 C17.2 1787.2,687.2 1890,790 R19.2
CHIP_PU: C14.2 J5.3 Q1.3 R16.1 SW1.1 SW1.2 U3.45 | length 3390.7
  L1 w10: Q1.3 1157.42,577.58 1215,520 1275,520 1315,480 1315,290 1243.5,218.5 SW1.2 SW1.1 1556.5,201.5 1572.2,217.2 C14.2 R16.1 1544.77,272.99 1465,352.76 v1(1465,505) ; J5.3 2522,122 2552.47,122 2629.29,198.82 U3.45
  L4 w10: v1(1465,505) 1605,505 1660,560 2090,560 2282.04,367.96 2571.18,367.96 2595,344.14 2595,195 J5.3
CON_GPIO0: J4.3 R17.2 | length 551
  L1 w10: R17.2 1957.99,862.99 1975,880 2380,880 J4.3
CONN1_USB_N: D4.2 J1.A7 J1.B7 R6.2 | length 456.1
  L1 w6.03: v1(475,745) 480,740 R6.2
  L1 w6.23: J1.A7 285.08,770.08 291.32,776.32 291.32,809.72 ; J1.B7 247.91,809.72 291.32,809.72 ; v1(355,780) 351.6,783.4 346.6,783.4 335,795 D4.2 334.72,809.72 291.32,809.72
  L4 w6.23: v1(355,780) 354.93,780 340,794.93 340,810 350.58,820.58 374.3,820.58 434.88,760 460.97,760 475,745.97 v1(475,745)
CONN1_USB_P: D5.2 J1.A6 J1.B6 R7.2 | length 499.6
  L1 w6.03: v1(475,785) 480,790 R7.2
  L1 w6.23: J1.A6 247.4,790 220,790 210,780 210,758.65 218.26,750.39 J1.B6 247.68,750.35 334.96,750.35 D5.2 335,765.32 323.4,776.92 318.4,776.92 v1(315,780.32)
  L4 w6.23: v1(315,780.32) 315,782.08 325.77,792.85 325.77,815.89 344.68,834.81 380.19,834.81 440.77,774.23 462.47,774.23 473.24,785 v1(475,785)
CONN2_USB_N: D7.2 J2.A7 J2.B7 R23.1 | length 1883.2
  L1 w6.03: J2.A7 218.53,210.24 215,213.77 215,246.07 218.53,249.61 J2.B7 280,249.61 284.61,249.61 314.21,220 337.76,220 341.84,215.93 341.84,207.56 345.37,204.02 391.62,204.02 391.66,204.06 452.48,204.06 461.47,213.05 v1(465,213.05) ; v1(1816,496) 1816,499.97 1831.03,515 R23.1
  L4 w6.03: v1(465,213.05) 468.53,213.05 477.52,204.06 624.54,204.06 854.53,434.05 1451.02,434.05 1502.99,486.02 1803.48,486.02 1813.46,496 v1(1816,496)
CONN2_USB_P: D8.2 J2.A6 J2.B6 R25.1 | length 1855
  L1 w6.03: J2.B6 290.63,190.55 ; J2.A6 280.92,229.92 290.63,220.21 290.63,190.55 ; D8.2 316.34,174.21 300,190.55 290.63,190.55 ; D8.2@337.96,174.21 341.84,178.09 341.84,186.46 345.37,189.99 397.43,189.99 397.47,190.03 452.48,190.03 461.47,181.05 v1(465,181.05) ; v1(1821,464) 1821,460.03 1836.03,445 R25.1
  L4 w6.03: v1(465,181.05) 468.53,181.05 477.52,190.03 630.35,190.03 860.34,420.02 1456.83,420.02 1508.81,471.99 1808.48,471.99 1816.48,464 v1(1821,464)
CONN_ESP_USB_N: J5.21 R24.1 | length 1722.2
  L1 w6.03: J5.21 689.45,50 692.98,53.53 692.98,79.47 770.97,157.46 770.97,182.48 761.99,191.47 v1(761.99,195) ; R24.1 v1(1985,515)
  L4 w6.03: v1(761.99,195) 761.99,199.86 770.97,208.85 770.97,310.81 822.14,361.99 1452.14,361.99 1548.12,457.96 1734.49,457.96 1770.47,421.99 1811.53,421.99 1876.56,487.01 1981.47,487.01 1985,490.55 v1(1985,515)
CONN_ESP_USB_P: J5.20 R26.1 | length 1699
  L1 w6.03: J5.20 710.55,50 707.01,53.53 707.01,73.66 785,151.64 785,182.48 793.99,191.47 v1(793.99,195) ; R26.1 v1(1985,445)
  L4 w6.03: v1(793.99,195) 793.99,199.86 785,208.85 785,305 827.96,347.96 1457.96,347.96 1553.93,443.93 1728.68,443.93 1764.66,407.96 1817.34,407.96 1882.37,472.99 1981.47,472.99 1985,469.45 v1(1985,445)
DTR_FTDI: Q2.2 R21.2 U1.18 | length 441.2
  L1 w10: U1.18 815,770 830,755 840,745 895,745 977.99,662.01 R21.2 1010,750 1035,775 1045,775 1080.18,774.99 Q2.2
ESP_USB_N: R23.2 R24.2 U3.23 | length 253.1
  L1 w6.03: R23.2@1907.5,508.33 1902.01,513.82 R23.2 1902.01,493.81 1905.54,490.28 2065.28,490.28 2075,500 U3.23
ESP_USB_P: R25.2 R26.2 U3.24 | length 247.7
  L1 w6.03: R26.2@1907.01,446.18 R25.2 1907.01,472.01 1911.25,476.25 2065,476.25 2076.25,465 2117.91,465 U3.24
FTDI_RESET: C6.1 R8.2 U1.11 | length 151
  L1 w10: R8.2 595.1,607.11 649.9,607.11 C6.1 650,660 670.63,680.63 U1.11
FTDI_USB_N: R6.1 U1.9 | length 95.8
  L1 w6.03: R6.1 554.62,747.61 554.62,749.94 558.16,753.47 595,753.47 610,753.47 612.49,750.99 633.91,750.99 U1.9
FTDI_USB_P: R7.1 U1.8 | length 103.9
  L1 w6.03: R7.1 554.62,782.39 554.62,772.26 559.38,767.5 608.68,767.5 611.17,770 U1.8
GND: C1.1 C2.1 C3.2 C4.2 C5.2 C6.2 C7.1 C8.1 C9.1 C10.1 C11.1 C12.1 C13.1 C14.1 C15.1 C16.1 C17.1 D1.1 D3.1 D4.1 D5.1 D6.1 D7.1 D8.1 J1.A1B12 J1.B1A12 J1.S1 J1.S2 J1.S3 J1.S4 J2.A1B12 J2.B1A12 J2.S1 J2.S2 J2.S3 J2.S4 J4.1 J4.23 J4.24 J5.2 J5.24 R9.1 R11.1 R12.1 R13.1 R14.1 R15.1 SW1.3 SW1.4 SW2.3 SW2.4 U1.3 U1.13 U1.21 U2.2 U2.4 U3.1 U3.2 U3.42 U3.43 U3.46 U3.47 U3.48 U3.49 U3.50 U3.51 U3.52 U3.53 U3.54 U3.55 U3.56 U3.57 U3.58 U3.59 U3.60 U3.61 U3.62 U3.63 U3.64 U3.65 U3.66 U3.67 U3.68 U3.69 U3.70 U3.71 U3.72 U3.73 | length 3925.8
  L1 w10: U3.42 v1(2528.9,265.75) ; U3.43 v1(2562.36,265.75) ; v1(2595.83,734.25) U3.2
  L1 w10.01: v1(705,890) 710,885 U1.3
  L1 w12: J1.B1A12 258.46,653.94 279.81,632.59 279.81,615.19 v1(280,615) ; J1.A1B12 299.09,905.91 v1(300,905) ; v1(310,595) 312.3,597.3 312.3,610.17 326.31,624.19 326.31,629.11 D3.1 ; v1(315,410) 326.31,398.69 326.31,370.89 D6.1 ; D8.1 365.37,148.62 371.75,155 v1(375,155) ; D7.1 366.36,245.39 371.75,240 v1(375,240) ; D5.1 365.59,724.72 375,734.13 v1(375,754.13) ; D4.1 365.59,835.59 375,845 v1(375,865) ; R11.1 440.88,747.72 447.91,740.69 447.91,727.09 v1(450,725) ; R12.1 416,814 449,814 v1(450,815) ; C1.1 457.2,628.62 492.7,593.12 492.7,577.3 v1(495,575) ; U1.13@710,683.29 710,678.79 733.79,655 v1(735,655)
  L1 w15: J2.A1B12 258.46,346.06 280,367.6 v1(280,390) ; R14.1 410.83,167.36 433.43,167.36 453.28,147.51 453.28,131.72 v1(455,130) ; R15.1 410.83,233.43 433.43,233.43 453.28,253.28 453.28,269.07 v1(455,270.79) ; C7.1 458.29,368.92 481.21,368.92 490,360.13 490,337.44 v1(485,332.44) ; v1(470,685) 470.43,685.43 C4.2 ; v1(470,850) C10.1 ; v1(650,540) C6.2 ; C2.1 757.2,563.62 775.83,545 v1(790,545) ; C3.2 757.2,618.62 780.83,595 v1(790,595) ; v1(1630,140) 1630,159.17 1653.62,182.8 C14.1 ; v1(1690,205) 1691.72,203.28 1691.72,191.76 1702.18,181.3 D1.1 ; v1(2061,220) 2065.41,224.41 U3.64 ; v1(2441,896) 2441.9,895.1 2441.9,855.9 C15.1 ; J5.2 2561.25,50 2612.84,101.58 2613.58,101.58 2622.8,110.8 C9.1 ; C16.1 2567.2,853.62 2595.83,825 v1(2595.83,818.7) 2622.88,818.7 ; v1(2629.29,265.75) U3.46 ; v1(2629.29,299.21) U3.47 ; v1(2629.29,332.68) U3.48 ; v1(2629.29,366.14) U3.49 ; v1(2629.29,399.61) U3.50 ; v1(2629.29,433.07) U3.51 ; v1(2629.29,466.54) U3.52 ; v1(2629.29,500) U3.53 ; v1(2629.29,533.46) U3.54 ; v1(2629.29,566.93) U3.55 ; v1(2629.29,600.39) U3.56 ; v1(2629.29,633.86) U3.57 ; v1(2629.29,667.32) U3.58 ; v1(2629.29,700.79) U3.59 ; v1(2629.29,734.25) U3.60 ; U3.1 2629.29,812.29 2622.88,818.7 ; J4.1 2650,900.07 2657.2,892.87 C8.1 ; U3.62 2670.63,798 2649.93,818.7 2622.88,818.7
  L1 w20: J2.B1A12 299.09,94.09 v1(300,95) ; v1(505,295) v1(550,295) ; C13.1 525,292.5 ; v1@539.23,294.23 549.23,294.23 v1(550,295) ; C12.1 580,283.92 ; 580,306.08 C11.1 ; v1@590,293.92 v1(590,295) ; v1@590,296.08 v1(590,295) ; U2.2 596.08,290 591.08,295 v1(590,295) ; R9.1 940,555 v1(945,550) ; R13.1 940,605 v1(950,595) ; C5.2 960.63,800 v1(970,809.37) ; U2.4@927.48,255 903.03,279.45 U2.4 903.03,295.55 927.48,320 v1(960,320) ; v1(1235,397.01) 1243.5,388.5 SW1.4 ; SW2.4 1306.42,838.58 v1(1315,830) ; SW1.3 1556.5,396.5 v1(1565,405) ; v1(1556.5,789.69) SW2.3 ; v1(1610,627.99) 1628.82,627.99 1653.62,652.8 C17.1 ; v1(2050,750) 2075.59,775.59 U3.63 ; v1(2290,435.04) U3.73 ; v1(2290,500) U3.72 ; v1(2290,564.96) U3.71 ; v1(2361.57,466.54) U3.61 ; v1(2395.04,394.96) U3.70 ; U3.69 v1(2395.04,605.04) ; U3.68 v1(2500,435) ; U3.67 v1(2500.08,500) ; U3.66 v1(2500.08,564.96) ; v1(2657.2,181.3) 2670.63,194.72 U3.65 ; v1(550,295) v1(590,295)
  other v1: 735,175 820,175 1005,320 1060,320 1115,320 1170,320 960,385 1005,385 1060,385 1115,385 1170,385 1780,445 2035,445 960,460 1005,460 1060,460 1115,460 1170,460 2428.5,466.54 1780,515 2035,515 2361.57,533.46 2428.5,533.46 1735,635 690,750 735,750 690,785 735,785
GPIO0: R17.1 R19.1 U3.4 | length 630.4
  L1 w10: R19.1 R17.1 2413.31,840 2438.31,815 2518.18,815 2528.9,804.28 U3.4
GPIO1: J4.4 U3.5 | length 284
  L1 w10: v1(2495.43,734.25) U3.5
  L4 w10: 2370,925 2495.43,799.57 v1(2495.43,734.25)
GPIO2: D2.1 J4.5 U3.6 | length 1679.8
  L1 w10: v1(1655,790) 1683.7,818.7 D2.1 1730,870.07 1760,900.07 2200.07,900.07 J4.5 ; v1(2461.97,675) U3.6
  L4 w10: v1(1655,790) 1655,790.14 1667.86,803 1827.29,803 1873.87,756.43 1970.29,756.43 2078.72,648 2406.22,648 2433.22,675 v1(2461.97,675)
GPIO3: J4.6 U3.7 | length 409.5